# Altium PCB HDR-TH_10P-P2.54-V_2021-01-10.pcbdoc
Units mil, origin at the board's own origin, x right, y up, seen from the top; angles counter-clockwise.
Board outline 2098 x 1118 mil, 2 copper layers (Top Layer, Bottom Layer); 1 components, 0 nets, 10 pads, 0 vias.
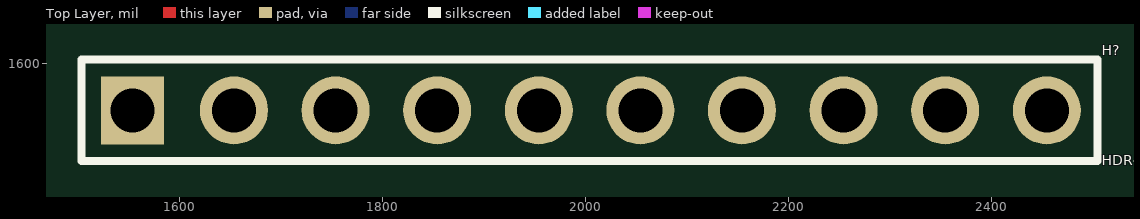
[diagram p0: Top Layer view]
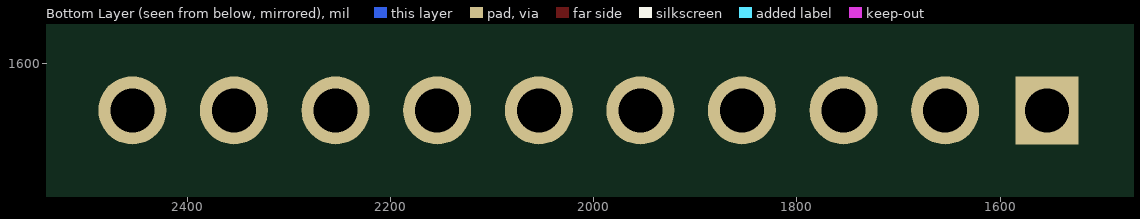
[diagram p1: Bottom Layer view, seen from below]

## Layer stack, top to bottom
Top Layer: signal copper (thickness not stored)
Dielectric: dielectric 12.6, FR-4, Dk 4.8
Bottom Layer: signal copper (thickness not stored)

## Board outline
3098,1000 1000,1000 1000,2118 3098,2118

## Components (designator, comment, footprint, x,y, rotation, side; value= is the part's Value field where it differs from the comment)
H? "HDR-TH_10P-P2.54-V" HDR-TH_10P-P2.54-V 2004,1554 r0 top

## Footprints (in the part's own frame and the unit in brackets; to place one, negate y for a bottom-side part, rotate by r counter-clockwise, add the part's x,y. Pads: shape width x height; smd on the part's side, far side on the other; paste and mask are expansions set on the pad)
HDR-TH_10P-P2.54-V [mm]
  rect 1.575x1.7 hole 1.1: 1(-11.43,0)
  round 1.7 hole 1.1: 2(-8.89,0) 3(-6.35,0) 4(-3.81,0) 5(-1.27,0) 6(1.27,0) 7(3.81,0) 8(6.35,0) 9(8.89,0) 10(11.43,0)
  silkscreen extent -12.7,-1.27 12.7,1.27

## Nets (pads, with @x,y where several pads share a name; then routed paths per layer and width w, separated by ;. In a path a pad name is that pad's centre, name@x,y a point inside that pad or via, vN(x,y) a via of type N, cw(c..) or ccw(c..) an arc to the next point about the centre after c; other vN are vias at no path point)
pads on no net: H?.1 H?.2 H?.3 H?.4 H?.5 H?.6 H?.7 H?.8 H?.9 H?.10

## Silkscreen, mask and mechanical layers (free items; w line width, h text height)
Document:
  lines w0.1: 2048,1558 2050,1560